# Altium PCB Barracuda3D.PcbDoc (part 1 of 3)
Units mil, origin at the board's own origin, x right, y up, seen from the top; angles counter-clockwise.
Board outline 4143.89 x 2810.03 mil, 5 copper layers (Top Layer, Mid-Layer 1, Groun Plane, Power Plane, Bottom Layer), stack 75.73 mil thick; 242 components, 180 nets, 863 pads, 455 vias.
Unrouted connection lines stored in the file: 270.
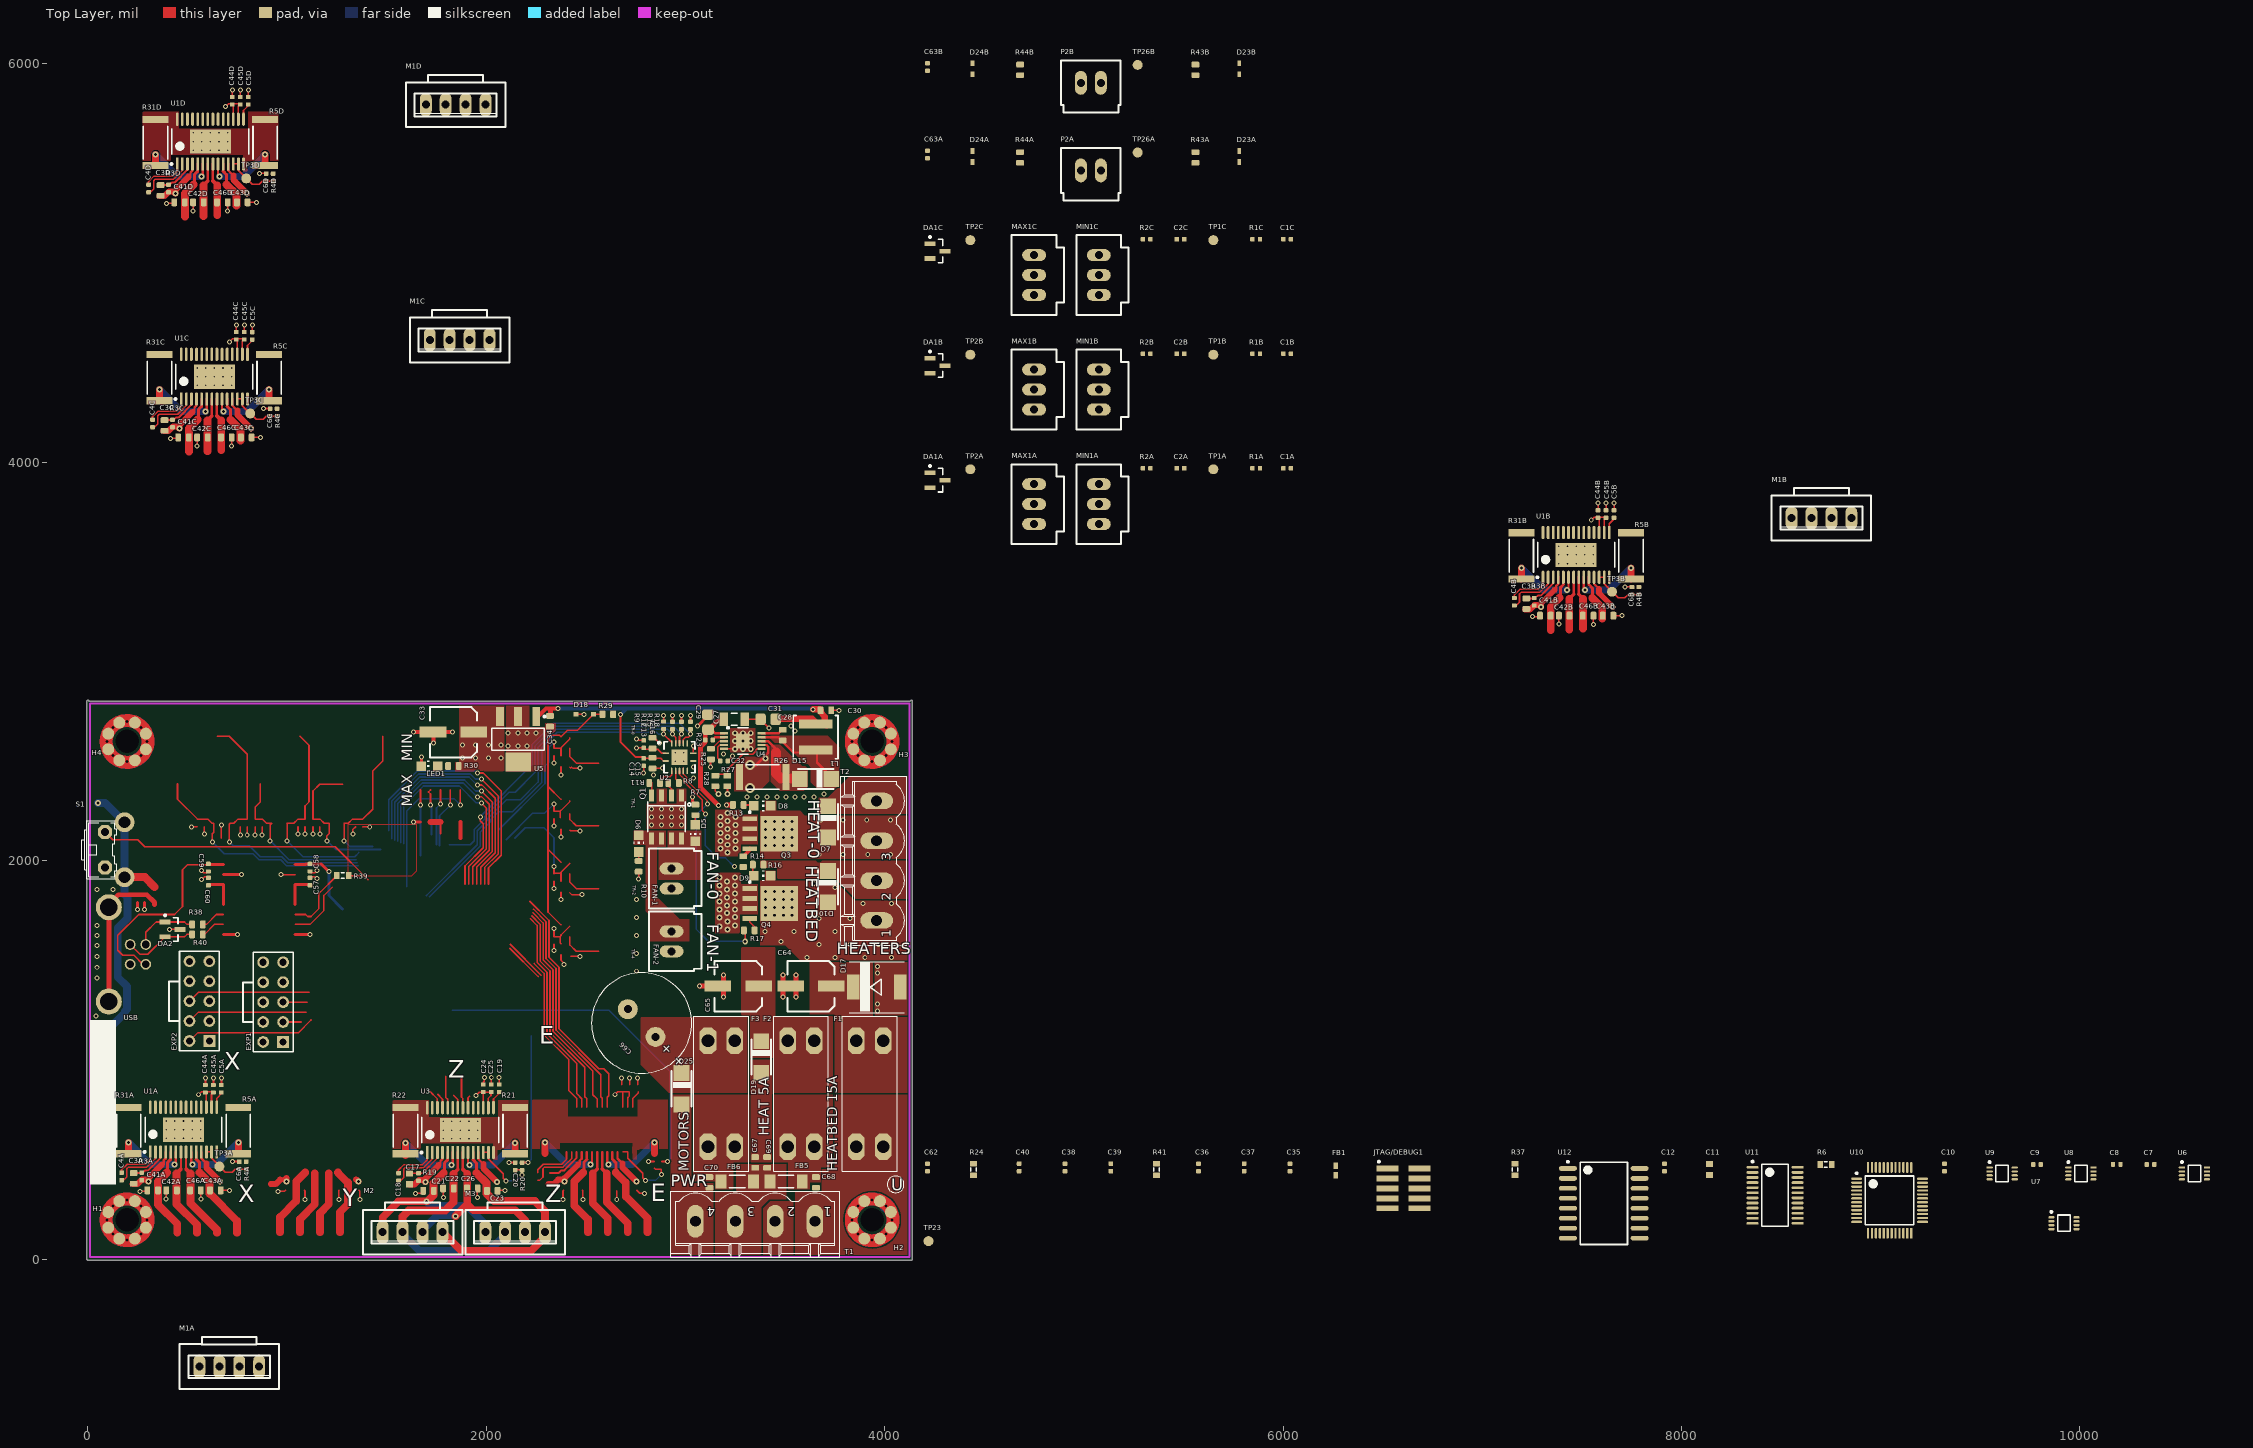
[diagram p0: Top Layer view]
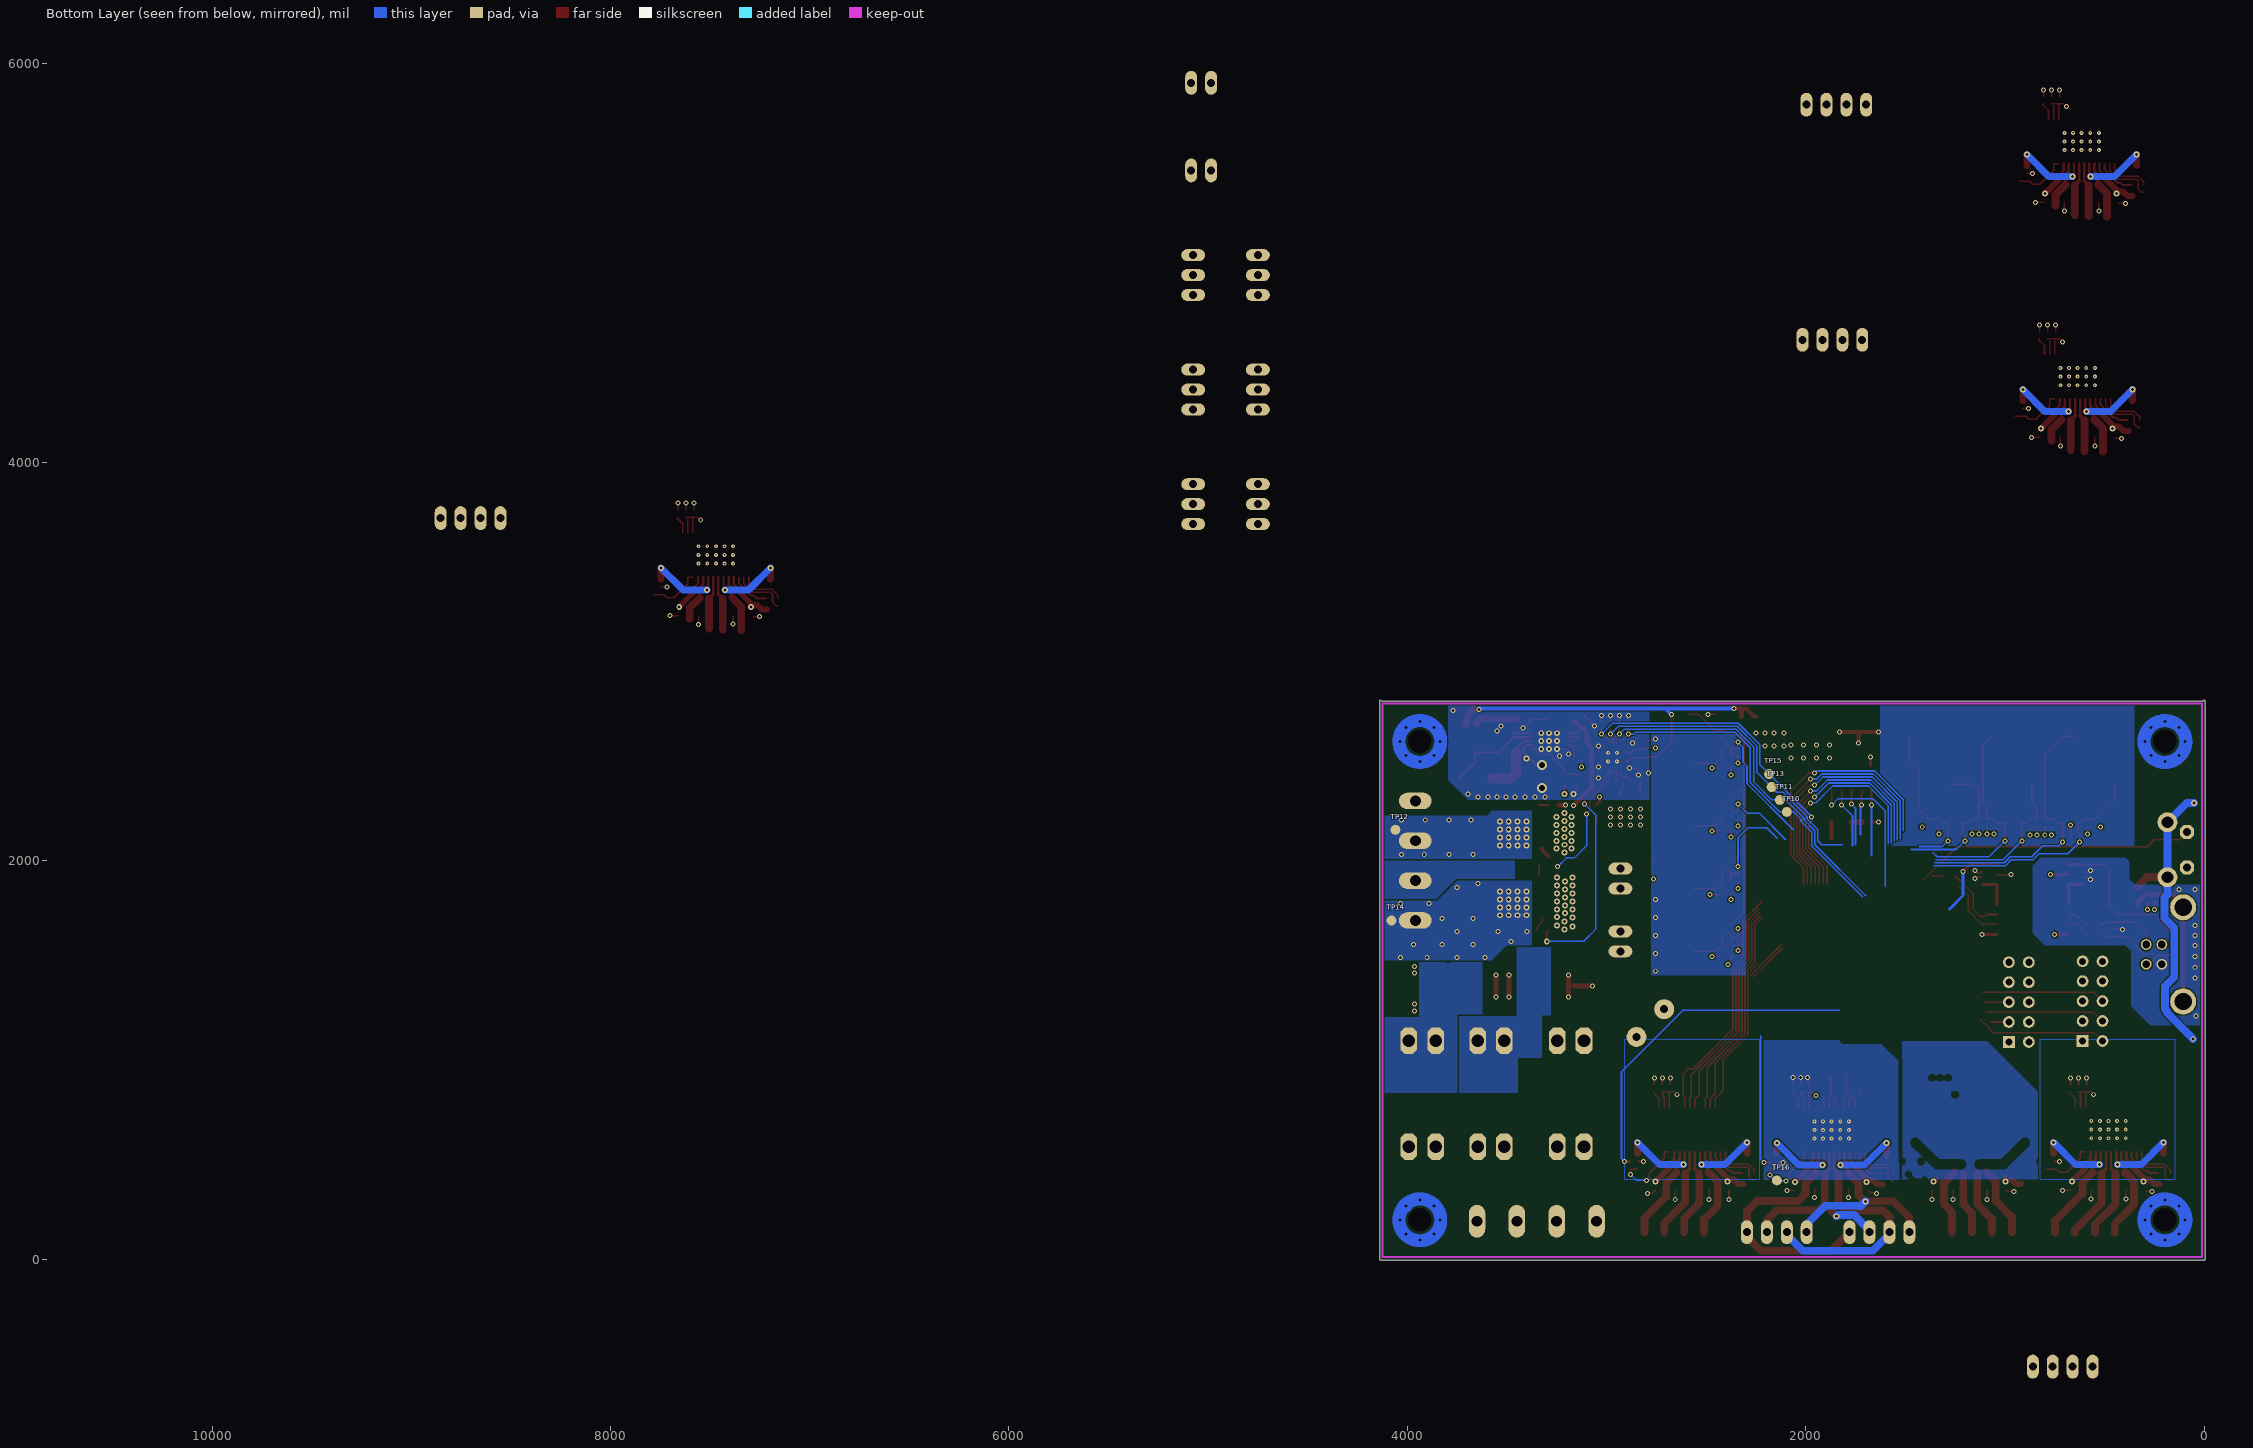
[diagram p1: Bottom Layer view, seen from below]
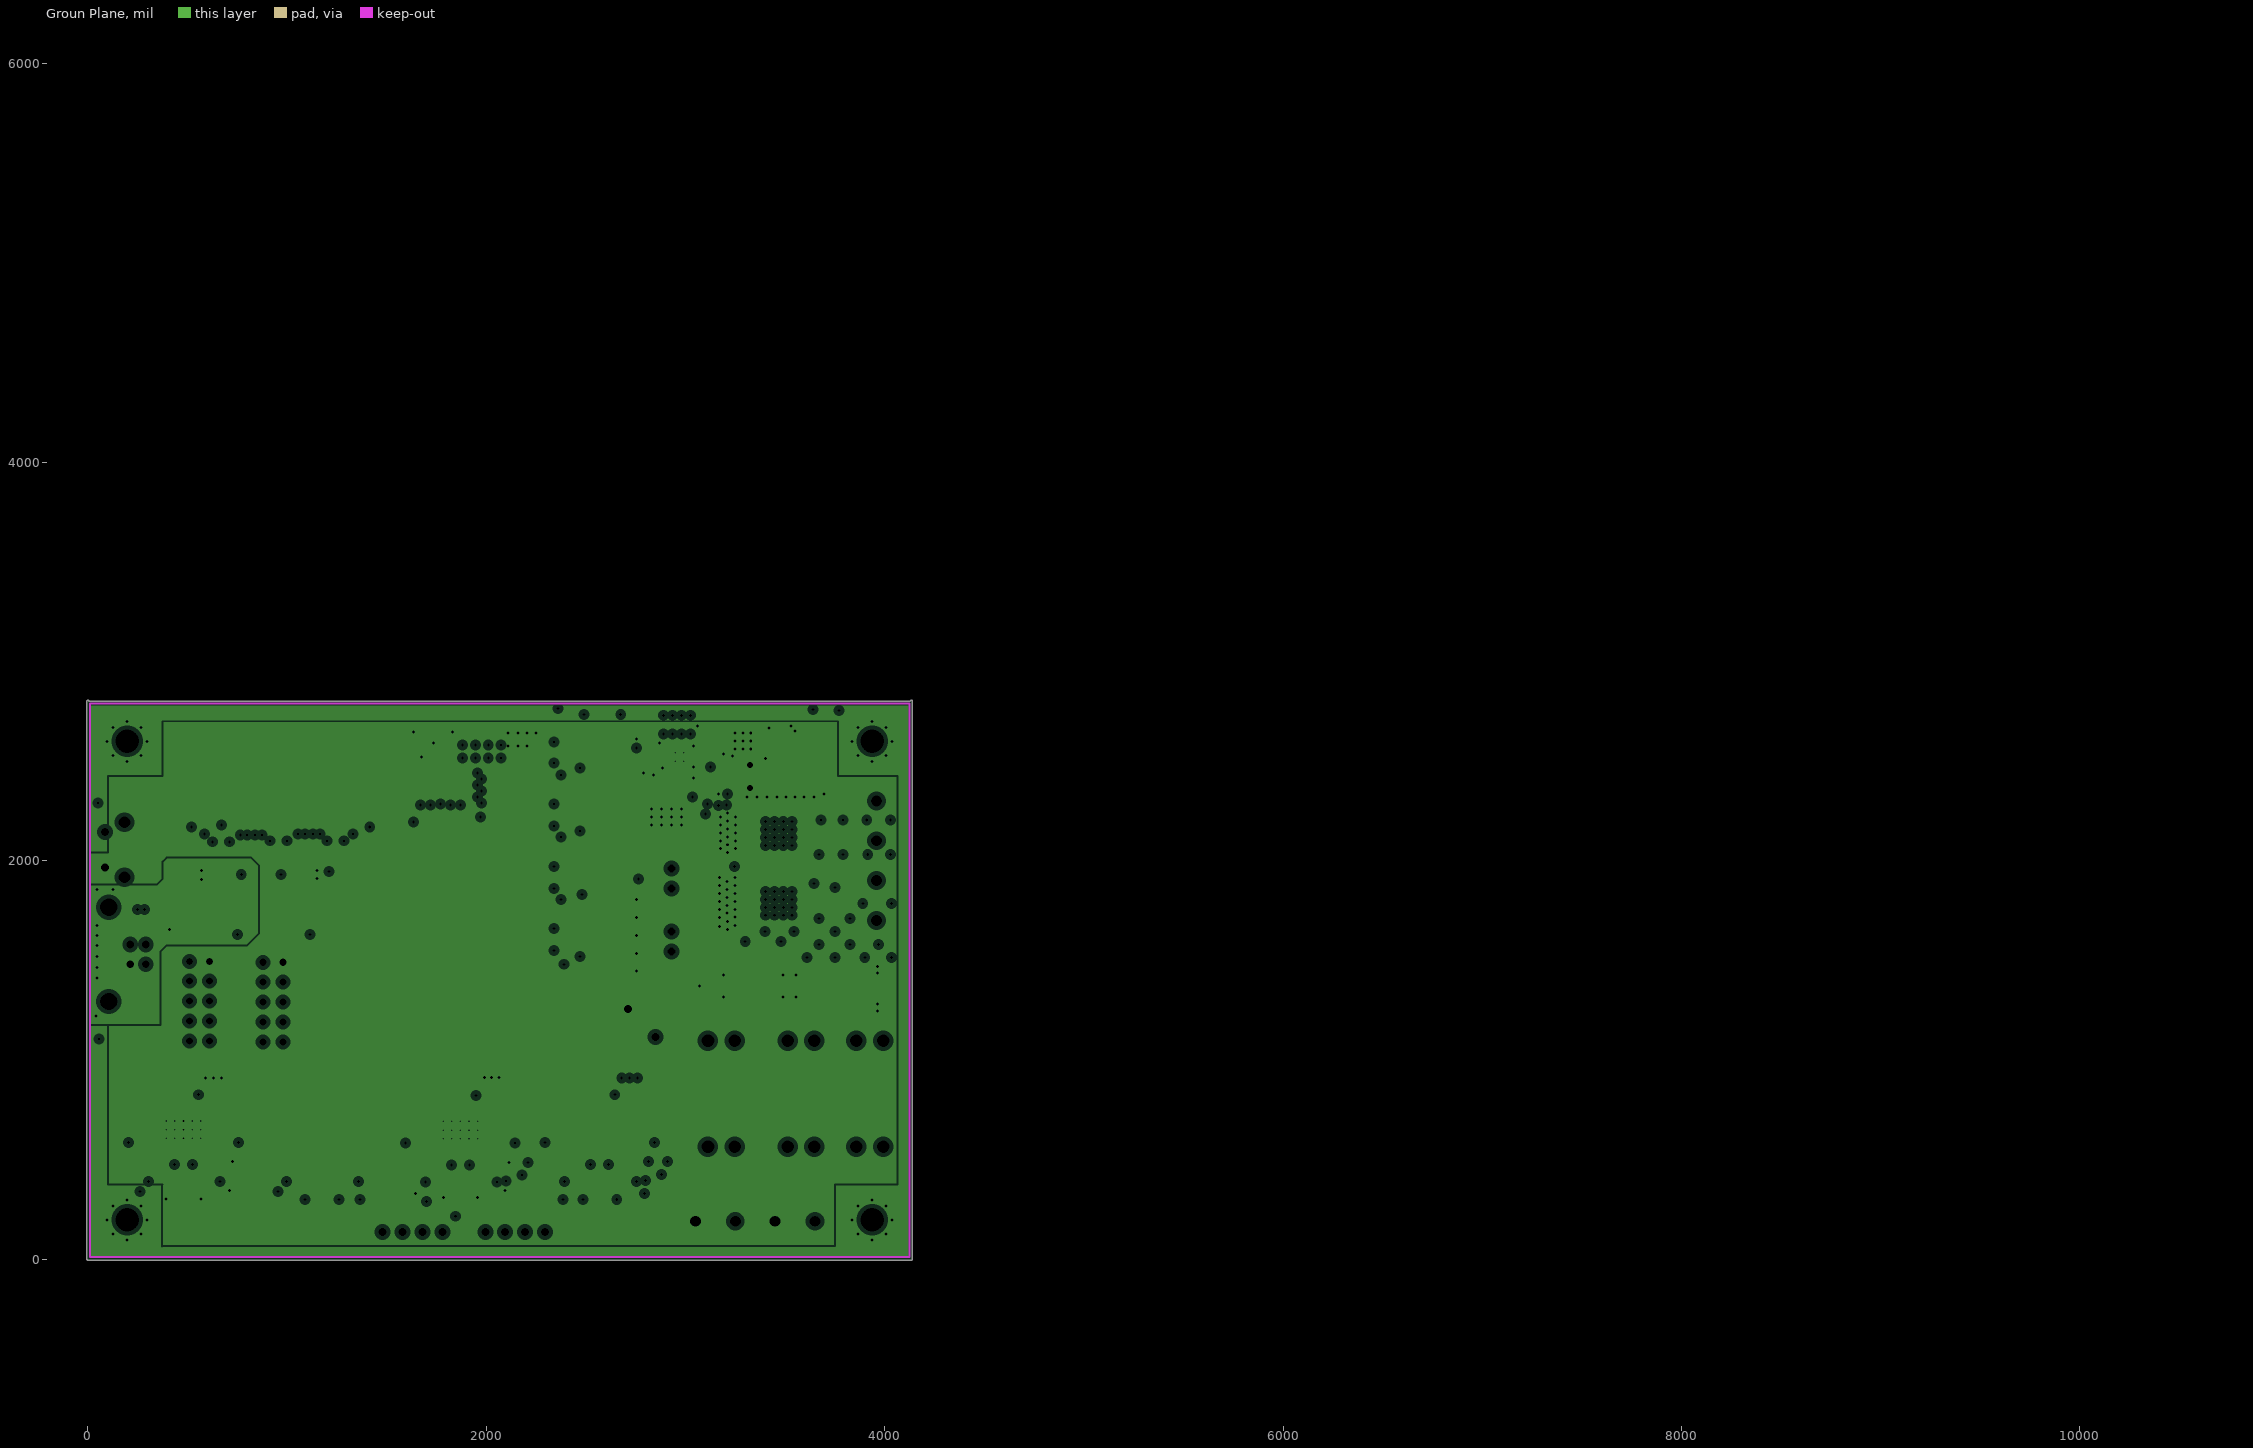
[diagram p2: Groun Plane, clearances drawn from the general rule]
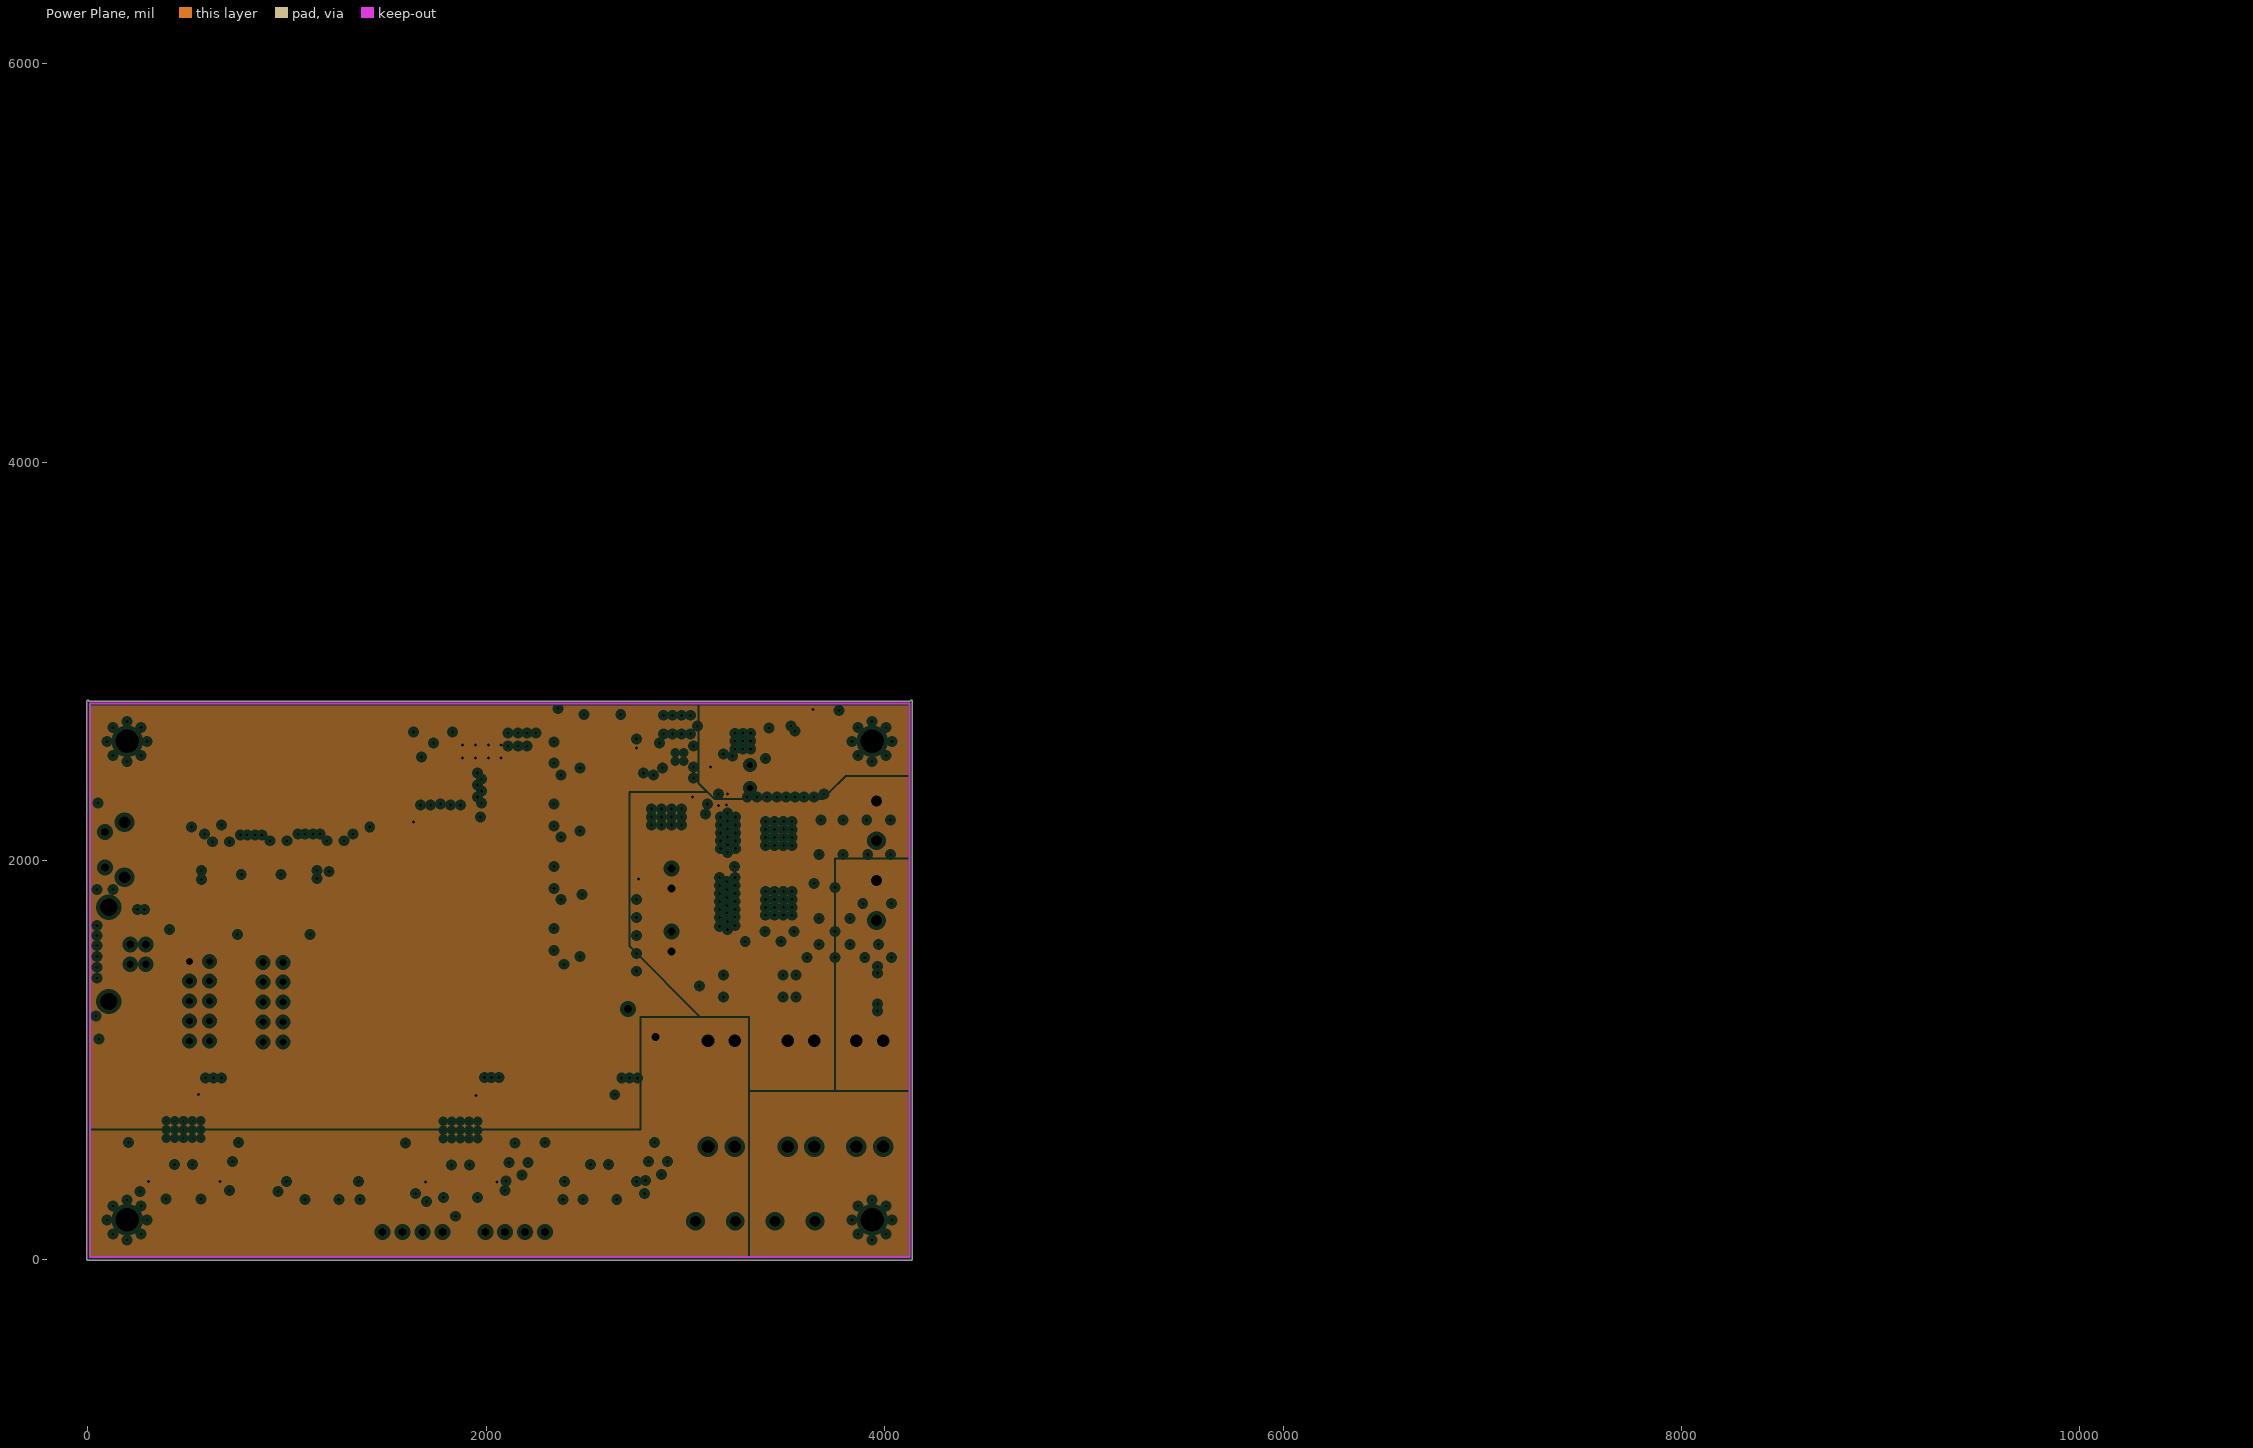
[diagram p3: Power Plane, clearances drawn from the general rule]

## Layer stack, top to bottom
Top Solder: solder mask 0.4, Solder Resist, Dk 3.5
Top Layer: signal copper 2.75
Dielectric1: prepreg 21.654, FR-4, Dk 4.2
Mid-Layer 1: signal copper 1.4
Dielectric4: dielectric 12.6, FR-4, Dk 4.8
Groun Plane: plane copper 1.4, net (Multiple Nets)
Dielectric2: core 10.236, FR-4, Dk 4.2
Power Plane: plane copper 1.4, net (Multiple Nets)
Dielectric3: prepreg 21.54, FR-4, Dk 4.2
Bottom Layer: signal copper 2.75
Bottom Solder: solder mask 0.4, Solder Resist, Dk 3.5

## Board outline
0,-5.01 cw(c0,0) -5.01,0 -5.01,2800 cw(c0,2800) 5.01,2800.29 4128.85,2800.29 cw(c4133.86,2800) 4138.87,2800 4138.87,0 cw(c4133.86,0) 4133.86,-5.01

## Design rules (kind name [scope] priority, off if disabled: settings)
Clearance [All] p1: gap=7
ComponentClearance [All] p1: gap=0 collisioncheckmode=3 verticalgap=10 showdistances=FALSE
DiffPairsRouting [All] p1: maxlimit=10 minlimit=10 mostfreqgap=10 toplayer_minwidth=15 toplayer_maxwidth=15 toplayer_prefwidth=15 midlayer1_minwidth=15 midlayer1_maxwidth=15 midlayer1_prefwidth=15 bottomlayer_minwidth=15 bottomlayer_maxwidth=15 bottomlayer_prefwidth=15 maxuncoupledlength=500
FanoutControl Fanout_SOIC [(InComponent('U8') AND InComponent('U7'))] p3: bgadir=Out bgaviamode=Centered fanoutstyle=Staggered fanoutdirection=Alternating viagrid=1 // Fanout_SOIC (Default Rule)
FanoutControl Fanout_Small [All] p4: bgadir=Out bgaviamode=Centered fanoutstyle=Auto fanoutdirection=Alternating viagrid=1 // Fanout_Small (Default Rule)
HoleSize [All] p1: absolutevalues=TRUE maxlimit=200 minlimit=15 maxpercent=80.000 minpercent=20.000
MinimumSolderMaskSliver [All] p1 off: minsoldermaskwidth=10
PlaneClearance [All] p1: clearance=20
PlaneConnect [All] p1: planeconnectstyle=Direct reliefexpansion=20 reliefentries=4 reliefconductorwidth=10 reliefairgap=10
PolygonConnect [All] p1: connectstyle=Direct reliefconductorwidth=45 reliefentries=4 polygonreliefangle="90 Angle" airgapwidth=10
RoomDefinition U_Dogfish3D-ThermistorChannelB [InComponentClass('U_Dogfish3D-ThermistorChannelB')] p1: confinementstyle=ConfineIn formatcopy=TRUE lockcomponents=FALSE outline 4185,5745 5950,5745 5950,6130 4185,6130
RoomDefinition U_Dogfish3D-ThermistorChannelA [InComponentClass('U_Dogfish3D-ThermistorChannelA')] p2: confinementstyle=ConfineIn formatcopy=TRUE lockcomponents=FALSE outline 4185,5305 5950,5305 5950,5690 4185,5690
RoomDefinition "U_Dogfish3D - MCU - ATSAMD21G18" [InComponentClass('U_Dogfish3D - MCU - ATSAMD21G18')] p3: confinementstyle=ConfineIn formatcopy=TRUE lockcomponents=FALSE outline 4185,55 10670,55 10670,605 4185,605
RoomDefinition U_Dogfish3D-EndstopChannelC [InComponentClass('U_Dogfish3D-EndstopChannelC')] p4: confinementstyle=ConfineIn formatcopy=TRUE lockcomponents=FALSE outline 4180,4730 6090,4730 6090,5250 4180,5250
RoomDefinition U_Dogfish3D-EndstopChannelB [InComponentClass('U_Dogfish3D-EndstopChannelB')] p5: confinementstyle=ConfineIn formatcopy=TRUE lockcomponents=FALSE outline 4180,4155 6090,4155 6090,4675 4180,4675
RoomDefinition U_Dogfish3D-EndstopChannelA [InComponentClass('U_Dogfish3D-EndstopChannelA')] p6: confinementstyle=ConfineIn formatcopy=TRUE lockcomponents=FALSE outline 4180,3580 6090,3580 6090,4100 4180,4100
RoomDefinition Dogfish3D-DriverChannelD [InComponentClass('Dogfish3D-DriverChannelD')] p7: confinementstyle=ConfineIn formatcopy=TRUE lockcomponents=FALSE outline 965,4985 965,5970 265,5970 265,4985
RoomDefinition Dogfish3D-DriverChannelC [InComponentClass('Dogfish3D-DriverChannelC')] p8: confinementstyle=ConfineIn formatcopy=TRUE lockcomponents=FALSE outline 985,3805 985,4790 285,4790 285,3805
RoomDefinition Dogfish3D-DriverChannelB [InComponentClass('Dogfish3D-DriverChannelB')] p9: confinementstyle=ConfineIn formatcopy=TRUE lockcomponents=FALSE outline 7821.3,2910 7821.3,3895 7121.3,3895 7121.3,2910
RoomDefinition Dogfish3D-DriverChannelA [InComponentClass('Dogfish3D-DriverChannelA')] p10: confinementstyle=ConfineIn formatcopy=TRUE lockcomponents=FALSE outline 830,25 830,1010 130,1010 130,25
RoutingLayers [All] p1: top layer_v5=TRUE mid layer 1_v5=FALSE bottom layer_v5=TRUE
RoutingVias [All] p1: holewidth=15 width=25 viastyle="Through Hole" minholewidth=15 minwidth=25 maxholewidth=28 maxwidth=50
SilkToSilkClearance [All] p1 off: silktosilkclearance=10
SilkToSolderMaskClearance SilkscreenOverComponentPads [IsPad] p1 off: minsilkscreentomaskgap=10 clearancetoexposedcopper=TRUE
SolderMaskExpansion [All] p1: expansion=4
UnpouredPolygon [All] p1: allowunpoured=FALSE
Width [All] p1: maxlimit=200 minlimit=7 preferedwidth=8 midlayer1_maxwidth=50 minimp=50.000000 maximp=50.000000 favimp=50.000000
18 further rules are at their usual default settings.

## Classes and differential pairs
component class U_Dogfish3D-ThermistorChannelB: C63B D23B D24B P2B R43B R44B TP26B
component class U_Dogfish3D-ThermistorChannelA: C63A D23A D24A P2A R43A R44A TP26A
component class U_Dogfish3D-EndstopChannelC: C1C C2C DA1C MAX1C MIN1C R1C R2C TP1C TP2C
component class U_Dogfish3D-EndstopChannelB: C1B C2B DA1B MAX1B MIN1B R1B R2B TP1B TP2B
component class U_Dogfish3D-EndstopChannelA: C1A C2A DA1A MAX1A MIN1A R1A R2A TP1A TP2A
component class Dogfish3D-DriverChannelD: C3D C4D C5D C6D C41D C42D C43D C44D C45D C46D M1D R3D R4D R5D R31D TP3D U1D
component class Dogfish3D-DriverChannelC: C3C C4C C5C C6C C41C C42C C43C C44C C45C C46C M1C R3C R4C R5C R31C TP3C U1C
component class Dogfish3D-DriverChannelB: C3B C4B C5B C6B C41B C42B C43B C44B C45B C46B M1B R3B R4B R5B R31B TP3B U1B
component class Dogfish3D-DriverChannelA: C3A C4A C5A C6A C41A C42A C43A C44A C45A C46A M1A R3A R4A R5A R31A TP3A U1A
channel class TR: U_TR1 U_TR2 U_TR3 U_TR4
net class AN_BUS[1..4]: AN_BUS1 AN_BUS2 AN_BUS3 AN_BUS4
channel class M: M1 M2 M3
channel class ES: ES1 ES2 ES3
net class STEP_BUS[1..3]: STEP_BUS1 STEP_BUS2 STEP_BUS3
net class REF_BUS[1..3]: REF_BUS1 REF_BUS2 REF_BUS3
net class MOD2E_BUS[1..3]: MOD2E_BUS1 MOD2E_BUS2 MOD2E_BUS3
net class MOD1E_BUS[1..3]: MOD1E_BUS1 MOD1E_BUS2 MOD1E_BUS3
net class MOD0E_BUS[1..3]: MOD0E_BUS1 MOD0E_BUS2 MOD0E_BUS3
net class MAX_ES_BUS[1..3]: MAX_ES_BUS1 MAX_ES_BUS2 MAX_ES_BUS3
net class DIR_BUS[1..3]: DIR_BUS1 DIR_BUS2 DIR_BUS3
component class "U_Dogfish3D - Power": C27 C28 C29 C30 C31 C32 C33 C34 C64 C65 C66 C67 C68 C69 C70 D15 D17 D18 D19 D25 F1 F2 F3 FB5 FB6 H1 H2 H3 H4 L1 LED1 R23 R25 R26 R27 R28 R29 R30 T1 TP23 U4 U5
component class U_MZ: C17 C18 C19 C20 C21 C22 C23 C24 C25 C26 M2 M3 R19 R20 R21 R22 TP16 U3
component class "U_Dogfish3D - MOSFETs and Driver": C13 C14 C15 C16 D5 D6 D7 D8 D9 D10 FAN-1 FAN-2 Q1 Q3 Q4 R7 R8 R9 R10 R11 R12 R13 R14 R15 R16 R17 R18 T2 TP10 TP11 TP12 TP13 TP14 TP15 U2
component class "U_Dogfish3D - MCU - ATSAMD21G18": C7 C8 C9 C10 C11 C12 C35 C36 C37 C38 C39 C40 C57 C58 C59 C60 C62 DA2 EXP1 EXP2 FB1 JTAG/DEBUG1 R6 R24 R37 R38 R39 R40 R41 S1 U6 U7 U8 U9 U10 U11 U12 USB
differential pair UMCU: +UMCU_P -UMCU_N
differential pair UI: +UI_P -UI_N
differential pair UD: +UD_P -UD_N
differential pair R: +R_P -R_N

## Components (designator, comment, footprint, x,y, rotation, side; value= is the part's Value field where it differs from the comment)
C1A "0402" C0402 6020,3970 r0 top (schematic designator C1)
C1B "0402" C0402 6020,4545 r0 top (schematic designator C1)
C1C "0402" C0402 6020,5120 r0 top (schematic designator C1)
C2A "0402" C0402 5485,3970 r0 top (schematic designator C2)
C2B "0402" C0402 5485,4545 r0 top (schematic designator C2)
C2C "0402" C0402 5485,5120 r0 top (schematic designator C2)
C3A "100nF" C0603 230,405 r270 top (schematic designator C3)
C3B "100nF" C0603 7221.3,3290 r270 top (schematic designator C3)
C3C "100nF" C0603 385,4185 r270 top (schematic designator C3)
C3D "100nF" C0603 365,5365 r270 top (schematic designator C3)
C4A "0402" C0402 170,415 r270 top (schematic designator C4)
C4B "0402" C0402 7161.3,3300 r270 top (schematic designator C4)
C4C "0402" C0402 325,4195 r270 top (schematic designator C4)
C4D "0402" C0402 305,5375 r270 top (schematic designator C4)
C5A "0402" C0402 670,855 r270 top (schematic designator C5)
C5B "0402" C0402 7661.3,3740 r270 top (schematic designator C5)
C5C "0402" C0402 825,4635 r270 top (schematic designator C5)
C5D "0402" C0402 805,5815 r270 top (schematic designator C5)
C6A "100nF" C0402 760,470 r270 top (schematic designator C6)
C6B "100nF" C0402 7751.3,3355 r270 top (schematic designator C6)
C6C "100nF" C0402 915,4250 r270 top (schematic designator C6)
C6D "100nF" C0402 895,5430 r270 top (schematic designator C6)
C7 "100nF" C0402 10355,475 r0 top
C8 "100nF" C0402 10185,475 r0 top
C9 "100nF" C0402 9785,475 r0 top
C10 "100nF" C0402 9320,460 r90 top
C11 "0603" 1608[0603] 8140,450 r90 top
C12 "100nF" C0402 7915,460 r90 top
C13 "0402" C0402 2790,2585 r270 top
C14 "0402" C0402 2790,2495 r90 top
C15 "0603" C0603 2835,2490 r90 top
C16 "0603" C0603 2835,2590 r270 top
C17 "0603" 1608[0603] 1615,402.64 r90 top
C18 "0402" C0402 1560,412.64 r270 top
C19 "0402" C0402 2065,857.64 r270 top
C20 "100nF" C0402 2145,465 r90 top
C21 "10uF" C0603 1710,342.64 r180 top
C22 "10uF" C0603 1810,355 r180 top
C23 "10uF" C0603 2030,342.64 r0 top
C24 "100nF" C0402 1985,857.64 r90 top
C25 "100nF" C0402 2025,857.64 r90 top
C26 "10uF" C0603 1930,355 r0 top
C27 "4.7uF" C1206 3245,2710 r0 top
C28 "100nF" C0603 3488.31,2630.43 r270 top
C29 "1uF" C0805 3113.31,2695.43 r90 top
C30 "100nF" C0603 3705,2755 r0 top
C31 "10uF" C0805 3415,2710 r180 top
C32 "1uF" C0402 3193.31,2500.43 r0 top
C33 "EEE-1VA101XP" EEE-1VA101XP 1835,2645 r0 top
C34 "0603" C0603 2320,2700 r90 top
C35 "100nF" C0402 6035,460 r90 top
C36 "100nF" C0402 5575,460 r90 top
C37 "100nF" C0402 5805,460 r90 top
C38 "100nF" C0402 4905,460 r90 top
C39 "100nF" C0402 5135,460 r90 top
C40 "100nF" C0402 4675,460 r90 top
C41A "10uF" C0603 325,345 r180 top (schematic designator C41)
C41B "10uF" C0603 7316.3,3230 r180 top (schematic designator C41)
C41C "10uF" C0603 480,4125 r180 top (schematic designator C41)
C41D "10uF" C0603 460,5305 r180 top (schematic designator C41)
C42A "10uF" C0603 420,345 r180 top (schematic designator C42)
C42B "10uF" C0603 7411.3,3230 r180 top (schematic designator C42)
C42C "10uF" C0603 575,4125 r180 top (schematic designator C42)
C42D "10uF" C0603 555,5305 r180 top (schematic designator C42)
C43A "10uF" C0603 640,345 r0 top (schematic designator C43)
C43B "10uF" C0603 7631.3,3230 r0 top (schematic designator C43)
C43C "10uF" C0603 795,4125 r0 top (schematic designator C43)
C43D "10uF" C0603 775,5305 r0 top (schematic designator C43)
C44A "100nF" C0402 590,855 r90 top (schematic designator C44)
C44B "100nF" C0402 7581.3,3740 r90 top (schematic designator C44)
C44C "100nF" C0402 745,4635 r90 top (schematic designator C44)
C44D "100nF" C0402 725,5815 r90 top (schematic designator C44)
C45A "100nF" C0402 630,855 r90 top (schematic designator C45)
C45B "100nF" C0402 7621.3,3740 r90 top (schematic designator C45)
C45C "100nF" C0402 785,4635 r90 top (schematic designator C45)
C45D "100nF" C0402 765,5815 r90 top (schematic designator C45)
C46A "10uF" C0603 540,345 r0 top (schematic designator C46)
C46B "10uF" C0603 7531.3,3230 r0 top (schematic designator C46)
C46C "10uF" C0603 695,4125 r0 top (schematic designator C46)
C46D "10uF" C0603 675,5305 r0 top (schematic designator C46)
C57 "100nF" C0402 1115,1895 r90 top
C58 "100nF" C0402 1115,1965 r270 top
C59 "100nF" C0402 605,1965 r270 top
C60 "100nF" C0402 605,1895 r90 top
C62 "100nF" C0402 4215,460 r90 top
C63A "100nF" C0402 4215,5545 r90 top (schematic designator C63)
C63B "100nF" C0402 4215,5985 r90 top (schematic designator C63)
C64 "EEE-1VA101XP" EEE-1VA101XP 3630,1370 r0 top
C65 "EEE-1VA101XP" EEE-1VA101XP 3265,1370 r0 top
C66 "470uF" C12,5-5 2780,1185 r135 top
C67 "NP" C0603 3350,485 r90 top
C68 "NP" C0603 3655,385 r270 top
C69 "NP" C0603 3410,485 r90 top
C70 "NP" C0603 3120,385 r270 top
D5 "5988140107F" LED2012120 3050,2140 r270 top
D6 "5988140107F" LED2012120 2765,2085 r90 top
D7 "SK310A-TP" SMA-SM 3715,2195 r270 top
D8 "5988140107F" LED2012120 3385,2275 r0 top
D9 "5988140107F" LED2012120 3385,1925 r0 top
D10 "SK310A-TP" SMA-SM 3715,1870 r270 top
D15 "SK310A-TP" SMA-SM 3653.31,2410.43 r180 top
D17 "S3A-13-F" DO-214AB 3960,1365 r0 top
D18 "SZMM3Z4V7T1G" SOD323-R 2495,2735 r180 top
D19 "SK310A" SMA-SM 3380,1015 r270 top
D23A "1N4148WT" SOD523 5780,5535 r90 top (schematic designator D23)
D23B "1N4148WT" SOD523 5780,5975 r90 top (schematic designator D23)
D24A "1N4148WT" SOD523 4440,5535 r90 top (schematic designator D24)
D24B "1N4148WT" SOD523 4440,5975 r90 top (schematic designator D24)
D25 "SK310A" SMA-SM 2980,855 r270 top
DA1A "PESDxL2BT" SOT95P230X110-3N 4265,3910 r0 top (schematic designator DA1)
DA1B "PESDxL2BT" SOT95P230X110-3N 4265,4485 r0 top (schematic designator DA1)
DA1C "PESDxL2BT" SOT95P230X110-3N 4265,5060 r0 top (schematic designator DA1)
DA2 "PESDxL2BT" SOT95P230X110-3N 425,1655 r0 top
EXP1 "Header 5X2" HDR2X5 980,1090 r90 top
EXP2 "Header 5X2" HDR2X5 610,1095 r90 top
F1 "3557-2" 3557 3925,830 r90 top
F2 "3557-2" 3557 3580,830 r90 top
F3 "3557-2" 3557 3180,830 r90 top
FAN-1 "Molex 70543-02" 70543-02 2930,1910 r90 top
FAN-2 "Molex 70543-02" 70543-02 2930,1595 r90 top
FB1 "BLM15HG601SN1D" BLM18PG121SN1D 6265,445 r90 top
FB5 "BLM41PG600SN1L" L1806 3505,390 r0 top
FB6 "BLM41PG600SN1L" L1806 3260,390 r180 top
H1 "Hole" Wave_hole_3x7-singleSided#1 196.85,196.85 r0 top
H2 "Hole" Wave_hole_3x7-singleSided#1 3937.01,196.85 r0 top
H3 "Hole" Wave_hole_3x7-singleSided#1 3937.01,2598.43 r0 top
H4 "Hole" Wave_hole_3x7-singleSided#2 196.85,2598.43 r0 top
JTAG/DEBUG1 "FTSH-105-XX-X-DV" FTSH-105-XX-X-DV 6605,355 r90 top
L1 "XAL5050-153MEB" XAL50xx-153 3653.31,2620.43 r90 top
LED1 "5988170107F" LED2012120 1715,2475 r180 top
M1A "Molex 0705430003" 4POL254 710,-540 r180 top (schematic designator M1)
M1B "Molex 0705430003" 4POL254 8702.6,3720 r180 top (schematic designator M1)
M1C "Molex 0705430003" 4POL254 1866.3,4615 r180 top (schematic designator M1)
M1D "Molex 0705430003" 4POL254 1846.3,5795 r180 top (schematic designator M1)
M2 "Molex 0705430003" 4POL254 1630,135 r180 top
M3 "Molex 0705430003" 4POL254 2145,135 r180 top
MAX1A "Molex 70543-03" 70543-03 4750,3790 r90 top (schematic designator MAX1)
MAX1B "Molex 70543-03" 70543-03 4750,4365 r90 top (schematic designator MAX1)
MAX1C "Molex 70543-03" 70543-03 4750,4940 r90 top (schematic designator MAX1)
MIN1A "Molex 70543-03" 70543-03 5075,3790 r90 top (schematic designator MIN1)
MIN1B "Molex 70543-03" 70543-03 5075,4365 r90 top (schematic designator MIN1)
MIN1C "Molex 70543-03" 70543-03 5075,4940 r90 top (schematic designator MIN1)
P2A "Molex 70543-02" 70543-02 5035,5465 r0 top (schematic designator P2)
P2B "Molex 70543-02" 70543-02 5035,5905 r0 top (schematic designator P2)
Q1 "NCV8402AD" NCV8402AD-SOIC8 2905,2220 r180 top (schematic designator Q8)
Q3 "PSMN7R0-60YS" PSMN7R0-60YS 3425,2135 r0 top
Q4 "PSMN7R0-60YS" PSMN7R0-60YS 3425,1785 r0 top
R1A "2.7K" R0402 5865,3970 r0 top (schematic designator R1)
R1B "2.7K" R0402 5865,4545 r0 top (schematic designator R1)
R1C "2.7K" R0402 5865,5120 r0 top (schematic designator R1)
R2A "2.7K" R0402 5315,3970 r0 top (schematic designator R2)
R2B "2.7K" R0402 5315,4545 r0 top (schematic designator R2)
R2C "2.7K" R0402 5315,5120 r0 top (schematic designator R2)
R3A "1M" R0402 270,415 r270 top (schematic designator R3)
R3B "1M" R0402 7261.3,3300 r270 top (schematic designator R3)
R3C "1M" R0402 425,4195 r270 top (schematic designator R3)
R3D "1M" R0402 405,5375 r270 top (schematic designator R3)
R4A "2.7K" R0402 795,470 r270 top (schematic designator R4)
R4B "2.7K" R0402 7786.3,3355 r270 top (schematic designator R4)
R4C "2.7K" R0402 950,4250 r270 top (schematic designator R4)
R4D "2.7K" R0402 930,5430 r270 top (schematic designator R4)
R5A "2512" 2512R-0.55 755,645 r270 top (schematic designator R5)
R5B "2512" 2512R-0.55 7746.3,3530 r270 top (schematic designator R5)
R5C "2512" 2512R-0.55 910,4425 r270 top (schematic designator R5)
R5D "2512" 2512R-0.55 890,5605 r270 top (schematic designator R5)
R6 "Res3" J1-0603 8725,475 r0 top
R7 "1.8K" R0603 3050,2255 r90 top
R8 "10r" R0603 2940,2390 r180 top
R9 "100K" R0402 2890,2680 r270 top
R10 "1.8K" R0603 2765,1971.77 r270 top
R11 "10r" R0603 2845,2390 r180 top
R12 "100K" R0402 2935,2679 r270 top
R13 "1.8K" R0603 3265,2280 r180 top
R14 "10r" R0603 3290,1995 r90 top
R15 "100K" R0402 2980,2679 r270 top
R16 "1.8K" R0603 3365,1980 r0 top
R17 "10r" R0603 3320,1650 r0 top
R18 "100K" R0402 3025,2679 r270 top
R19 "1M" R0402 1660,412.64 r270 top
R20 "2.7K" R0402 2180,465 r270 top
R21 "2512" 2512R-0.55 2145,645 r270 top
R22 "2512" 2512R-0.55 1595,645 r270 top
R23 "200K" R0402 3118.31,2605.43 r180 top
R24 "Res3" J1-0603 4445,450 r90 top
R25 "10K" R0603 3128.31,2535.43 r270 top
R26 "0.6r" 2512R-0.55 3388.31,2420.43 r0 top
R27 "10K" R0603 3210,2400 r90 top
R28 "10K" R0603 3150,2400 r270 top
R29 "10K" R0603 2610,2735 r0 top
R30 "1K" R0603 1835,2475 r0 top
R31A "2512" 2512R-0.55 205,645 r270 top (schematic designator R31)
R31B "2512" 2512R-0.55 7196.3,3530 r270 top (schematic designator R31)
R31C "2512" 2512R-0.55 360,4425 r270 top (schematic designator R31)
R31D "2512" 2512R-0.55 340,5605 r270 top (schematic designator R31)
R37 "0603" J1-0603 7165,450 r90 top
R38 "24r" R0603 550,1680 r180 top
R39 "0603" J1-0603 1280,1925 r180 top
R40 "24r" R0603 550,1630 r180 top
R41 "Res3" J1-0603 5365,450 r90 top
R43A "4.7K" R0603 5560,5530 r90 top (schematic designator R43)
R43B "4.7K" R0603 5560,5970 r90 top (schematic designator R43)
R44A "4.7K" R0603 4680,5530 r90 top (schematic designator R44)
R44B "4.7K" R0603 4680,5970 r90 top (schematic designator R44)
S1 "1571610-2" B3F-31XX 135,2055 r270 top
T1 "con-phoenix-508 - 4" MSTBV4 3350,190 r180 top
T2 "con-phoenix-508 - 4" MSTBV4 3960,2000 r90 top
TP1A "TP4" TP-2 5650,3965 r90 top (schematic designator TP1)
TP1B "TP4" TP-2 5650,4540 r90 top (schematic designator TP1)
TP1C "TP4" TP-2 5650,5115 r90 top (schematic designator TP1)
TP2A "TP4" TP-2 4430,3965 r90 top (schematic designator TP2)
TP2B "TP4" TP-2 4430,4540 r90 top (schematic designator TP2)
TP2C "TP4" TP-2 4430,5115 r90 top (schematic designator TP2)
TP3A "TP4" TP-2 660,465 r180 top (schematic designator TP3)
TP3B "TP4" TP-2 7651.3,3350 r180 top (schematic designator TP3)
TP3C "TP4" TP-2 815,4245 r180 top (schematic designator TP3)
TP3D "TP4" TP-2 795,5425 r180 top (schematic designator TP3)
TP10 "TP4" TP-2 2095,2245 r90 bottom
TP11 "TP4" TP-2 2130,2305 r90 bottom
TP12 "TP4" TP-2 4060,2155 r90 bottom
TP13 "TP4" TP-2 2170.91,2370 r90 bottom
TP14 "TP4" TP-2 4080,1700 r90 bottom
TP15 "TP4" TP-2 2183.79,2435 r90 bottom
TP16 "TP4" TP-2 2145,395 r90 bottom
TP23 "TP4" TP-2 4220,90 r90 top
TP26A "TP4" TP-2 5270,5555 r90 top (schematic designator TP26)
TP26B "TP4" TP-2 5270,5995 r90 top (schematic designator TP26)
U1A "DRV8825" DRV8825PWPR 480,650 r90 top (schematic designator U1)
U1B "DRV8825" DRV8825PWPR 7471.3,3535 r90 top (schematic designator U1)
U1C "DRV8825" DRV8825PWPR 635,4430 r90 top (schematic designator U1)
U1D "DRV8825" DRV8825PWPR 615,5610 r90 top (schematic designator U1)
U2 "TXS0104E" "RGY  (S-PVQFN-N14)" 2970,2520 r0 top
U3 "DRV8825" DRV8825PWPR 1870,647.64 r90 top
U4 "LM25011MY/NOPB" VSSOP10 3288.31,2600.43 r0 top
U5 "MIC5209-3.3YS" SOT230P700X190-4N 2160,2610 r270 top
U6 "SN74LVC1G139" "Ti DCU (R-PDSO-G8) SOIC - SN74VC1G139" 10575,430 r0 top
U7 "SN74LVC1G139" "Ti DCU (R-PDSO-G8) SOIC - SN74VC1G139" 9920,180 r0 top
U8 "SN74LVC1G139" "Ti DCU (R-PDSO-G8) SOIC - SN74VC1G139" 10005,430 r0 top
U9 "SN74LVC1G139" "Ti DCU (R-PDSO-G8) SOIC - SN74VC1G139" 9610,430 r0 top
U10 "ATSAMD21G18" TSQFP50P900X900X120-48N 9045,295 r0 top
U11 "AD5206" "AD5206 & AD5204" 8470,320 r0 top
U12 "ADuM4160" ADuM4160 7610,280 r0 top
USB "USB-B" PN61729 105,1530 r270 top

## Footprints (in the part's own frame and the unit in brackets; to place one, negate y for a bottom-side part, rotate by r counter-clockwise, add the part's x,y. Pads: shape width x height; smd on the part's side, far side on the other; paste and mask are expansions set on the pad)
4POL254 [mil]
  oval 60x120 hole 40: 1(-150,0) 2(-50,0) 3(50,0) 4(150,0)
  silkscreen extent -250,-150 250,113, body extent -250,-150 250,113, height 454
1608[0603] [mm] "Chip Capacitor, Body 1.6x0.8mm, IPC High Density"
  rect 0.8x0.9 smd: 1(-0.7,0) 2(0.7,0)
  body extent -0.87,-0.48 0.87,0.48, height 1.3
2512R-0.55 [mm] "2512 Resistor 6.35mm x 3.2mm x 0.55mm"
  rect 0.9x3.3 smd: 1(-2.95,0) 2(2.95,0)
  silkscreen extent -2.1,-1.55 2.1,1.55, body extent -3.22,-1.68 3.22,1.68, height 0.65
3557 [mil] "3557"
  oct 133x83 hole 63: 1(-265,-67) 1(-265,67) 2(265,-67) 2(265,67)
  silkscreen extent -390,-138 390,138, body extent -392,-140 392,140, height 709
70543-02 [mil]
  oval 60x120 hole 40: 1(-50,0) 2(50,0)
  silkscreen extent -150,-150 150,113, body extent -150,-150 150,113, height 450
70543-03 [mil]
  oval 60x120 hole 40: 1(-100,0) 2(0,0) 3(100,0)
  silkscreen extent -200,-150 200,113, body extent -200,-150 200,113, height 450
"AD5206 & AD5204" [mm] "SOP, 24-Leads, Body 7.80x4.40mm, Pitch 0.65mm, IPC Medium Density"
  oval 1.55x0.35 smd: 1(-2.875,3.575) 2(-2.875,2.925) 3(-2.875,2.275) 4(-2.875,1.625) 5(-2.875,0.975) 6(-2.875,0.325) 7(-2.875,-0.325) 8(-2.875,-0.975) 9(-2.875,-1.625) 10(-2.875,-2.275) 11(-2.875,-2.925) 12(-2.875,-3.575) 13(2.875,-3.575) 14(2.875,-2.925) 15(2.875,-2.275) 16(2.875,-1.625) 17(2.875,-0.975) 18(2.875,-0.325) 19(2.875,0.325) 20(2.875,0.975) 21(2.875,1.625) 22(2.875,2.275) 23(2.875,2.925) 24(2.875,3.575)
  silkscreen extent -3,-3.95 1.7,4.42, body extent -2.25,-3.95 2.25,3.95, height 2.65
ADuM4160 [mm] "SOIC, 16-Leads, Body 10.30x7.50mm, Pitch 1.27mm, IPC Medium Density"
  oval 2.3x0.6 smd: 1(-4.575,4.445) 2(-4.575,3.175) 3(-4.575,1.905) 4(-4.575,0.635) 5(-4.575,-0.635) 6(-4.575,-1.905) 7(-4.575,-3.175) 8(-4.575,-4.445) 9(4.575,-4.445) 10(4.575,-3.175) 11(4.575,-1.905) 12(4.575,-0.635) 13(4.575,0.635) 14(4.575,1.905) 15(4.575,3.175) 16(4.575,4.445)
  silkscreen extent -4.7,-5.25 3.03,5.42, body extent -3.8,-5.25 3.8,5.25, height 2.65
B3F-31XX [mil]
  oct 70x70 hole 40: 1(-89,-49) 2(89,-49)
  round 100 hole 59: 3(-138,49) 4(138,49)
  silkscreen extent -145,-165 145,10, body extent -165,-200 165,109, height 303
BLM18PG121SN1D [mm] "Chip Inductor, 2-Leads, Body 1.0x0.5mm, IPC Medium Density"
  rect 0.8x0.6 smd: 1(-0.6,0) 2(0.6,0)
  body extent -0.52,-0.28 0.53,0.27, height 0.6
C12,5-5 [mil]
  round 100 hole 40: 1(-98.43,0) 2(98.43,0)
  silkscreen extent -252,-252 252,252, body extent -252,-252 252,252, height 787
C0402 [mil]
  rrect40% 22x24 smd: 1(-18.7,0) 2(19,0)
  body extent -20,-10 20,10, height 20
C0603 [mm]
  rrect40% 0.74x1 smd: 1(-0.68,0) 2(0.68,0)
  body extent -0.8,-0.4 0.8,0.4, height 0.8
C0805 [mil]
  rrect50% 52x60 smd: 1(-37.4,0) 2(38,0)
  body extent -40,-30 40,30, height 35
C1206 [mm]
  rect 1.1x1.7 smd: 1(-1.325,0) 2(1.325,0)
  silkscreen extent -0.4,-0.75 0.4,0.75, body extent -1.68,-0.87 1.67,0.88, height 1.6
DO-214AB [mil]
  rect 63x126 smd: A(119,0) C(-118.11,0)
  silkscreen extent -138,-128 138,128, body extent -140,-130 140,130, height 98
DRV8825PWPR [mm] "PowerPAD (HTSSOP) - PWP"
  oval 1.7x0.35 smd: 1(-2.85,4.225) 2(-2.85,3.575) 3(-2.85,2.925) 4(-2.85,2.275) 5(-2.85,1.625) 6(-2.85,0.975) 7(-2.85,0.325) 8(-2.85,-0.325) 9(-2.85,-0.975) 10(-2.85,-1.625) 11(-2.85,-2.275) 12(-2.85,-2.925) 13(-2.85,-3.575) 14(-2.85,-4.225) 15(2.85,-4.225) 16(2.85,-3.575) 17(2.85,-2.925) 18(2.85,-2.275) 19(2.85,-1.625) 20(2.85,-0.975) 21(2.85,-0.325) 22(2.85,0.325) 23(2.85,0.975) 24(2.85,1.625) 25(2.85,2.275) 26(2.85,2.925) 27(2.85,3.575) 28(2.85,4.225)
  rect 3.1x5.22 smd: 29(0,0)
  silkscreen extent -2.97,-4.9 1.6,5.07, body extent -2.25,-4.9 2.25,4.9, height 1.2
EEE-1VA101XP [mm] "Panasonic VS D EEE-1VA101XP"
  rect 3.4x1.4 smd: 1(2.6,0) 2(-2.6,0)
  silkscreen extent -3,-3.2 3,3.2, body extent -3.5,-3.3 3.5,3.3, height 5.4
FTSH-105-XX-X-DV [mm] "1.27mm pitch, 10 pin, terminal strip; vertical, SMT"
  rect 0.75x2.8 smd mask+0: 1(2.54,2.03) 2(2.54,-2.03) 3(1.27,2.03) 4(1.27,-2.03) 5(0,2.03) 6(0,-2.03) 7(-1.27,2.03) 8(-1.27,-2.03) 9(-2.54,2.03) 10(-2.54,-2.03)
  silkscreen extent 3.28,3.03 3.52,3.27
HDR2X5 [mm] "Connector; Header; 5x2 Position"
  rect 1.5x1.5 hole 0.9: 1(0,0)
  round 1.5 hole 0.9: 2(0,2.54) 3(2.54,0) 4(2.54,2.54) 5(5.08,0) 6(5.08,2.54) 7(7.62,0) 8(7.62,2.54) 9(10.16,0) 10(10.16,2.54)
  silkscreen extent -1.27,-1.27 11.43,3.81
J1-0603 [mm] "Chip Resistor, Body 1.6x0.8mm, IPC High Density"
  rect 0.7x0.9 smd: 1(-0.75,0) 2(0.75,0)
  silkscreen extent -0.2,-0.35 0.2,0.35, body extent -0.85,-0.48 0.85,0.48, height 0.9
L1806 [mm] "Chip Inductor, 2-Leads, Body 4.50x1.60mm, IPC Medium Density"
  rect 1.38x1.8 smd: 1(-2.06,0) 2(2.06,0)
  silkscreen extent -1,-0.8 1,0.8, body extent -2.35,-0.9 2.35,0.9, height 1.8
LED2012120 [mil]
  rect 48x48 smd: A(-41.34,0) C(42,0)
  silkscreen extent 0,-27 12,27, body extent -50,-25 50,25, height 28
MSTBV4 [mil]
  oval 82.5x165 hole 55: 1(-300,0) 2(-100,0) 3(100,0) 4(300,0)
  silkscreen extent -425,-150 425,180, body extent -428,-153 428,183, height 472
NCV8402AD-SOIC8 [mil]
  rect 24x60 smd: 1(-75,-108.27) 2(-25,-108.27) 3(25,-108.27) 4(75,-108.27) 5(25,109) 5(75,109) 7(-75,109) 7(-25,109)
  silkscreen extent -122,-75 95,75, body extent -98,-130 99,130, height 58
PN61729 [mil]
  round 54 hole 38: 1(50,186) 2(-49.21,186) 3(-49.21,107) 4(50,107)
  round 130.5 hole 87: P$1(-236.22,0) P$2(237,0)
  body extent -237,-405 238,226, height 406
PSMN7R0-60YS [mm]
  rect 1.8x0.6 smd: 1(-2.6,1.905) 2(-2.6,0.635) 3(-2.6,-0.635) 4(-2.6,-1.905)
  rect 4.8x4.5 smd: 5(1.14,0)
  silkscreen extent -2.72,2.63 -2.47,2.88, body extent -1.85,-2.5 2.25,2.5, height 1.2
R0402 [mil]
  rrect40% 22x24 smd: 1(-18.9,0) 2(19,0)
  body extent -20,-10 20,10, height 14
R0603 [mm]
  rrect40% 0.74x1 smd: 1(-0.68,0) 2(0.68,0)
  body extent -0.8,-0.4 0.8,0.4, height 0.8
"RGY  (S-PVQFN-N14)" [mm] "QFN, 16-Leads, Body 3.50x3.50mm, Pitch 0.50mm, Thermal Pad 2.00x2.00mm, IPC Medium Density"
  oval 0.8x0.2 smd: 1(-1.75,0.5) 7(1.75,0.5) 8(1.75,-0.5) 14(-1.75,-0.5)
  oval 0.2x0.8 smd: 2(-1,1.75) 3(-0.5,1.75) 4(0,1.75) 5(0.5,1.75) 6(1,1.75) 9(1,-1.75) 10(0.5,-1.75) 11(0,-1.75) 12(-0.5,-1.75) 13(-1,-1.75)
  rect 2x2 smd: 15(0,0)
  silkscreen extent -2.75,-1.97 1.97,1.97, body extent -1.83,-1.83 1.83,1.83, height 1
SMA-SM [mil]
  rect 79x79 smd: A(79,0) C(-78.74,0)
  silkscreen extent -89,-49 89,50, body extent -105,-54 105,55, height 116
SOD323-R [mil]
  rect 24x24 smd: A(44,0) C(-43.31,0)
  body extent -50,-31 50,31, height 28
SOD523 [mil]
  rect 28x20 smd: A(27.56,0) C(-27.56,0)
  body extent -30,-16 30,16, height 28
SOT95P230X110-3N [mm] "SOT23, 3-Leads, Body 2.90x2.30mm, Pitch 0.95mm, IPC Medium Density"
  rect 1.4x0.6 smd: 1(-0.95,0.95) 2(-0.95,-0.95) 3(0.95,0)
  silkscreen extent -1.07,-1.5 0.7,1.92, body extent -0.7,-1.5 0.7,1.5, height 1.1
SOT230P700X190-4N [mm] "SOT223, 4-Leads, Body 6.50x7.00mm (avg), Pitch 2.30mm, IPC Medium Density"
  rect 2.4x1 smd: 1(-2.9,2.3) 2(-2.9,0) 3(-2.9,-2.3)
  rect 2.4x3.25 smd: 4(2.9,0)
  silkscreen extent -3.02,-3.35 1.4,3.48, body extent -1.85,-3.35 1.85,3.35, height 1.9
"Ti DCU (R-PDSO-G8) SOIC - SN74VC1G139" [mm] "TSSOP, 8-Leads, Body 2.00x2.30mm, Pitch 0.50mm, IPC Medium Density"
  oval 0.8x0.3 smd: 1(-1.6,0.75) 2(-1.6,0.25) 3(-1.6,-0.25) 4(-1.6,-0.75) 5(1.6,-0.75) 6(1.6,-0.25) 7(1.6,0.25) 8(1.6,0.75)
  silkscreen extent -1.72,-1.05 0.8,1.57, body extent -1.2,-1.05 1.2,1.05, height 0.9
TP-2 [mil]
  round 50 smd: 1(0,0)
TSQFP50P900X900X120-48N [mm] "TSQFP, 48-Leads, Body 7.00x7.00mm, Pitch 0.50mm, IPC Medium Density"
  oval 1.4x0.3 smd: 1(-4.2,2.75) 2(-4.2,2.25) 3(-4.2,1.75) 4(-4.2,1.25) 5(-4.2,0.75) 6(-4.2,0.25) 7(-4.2,-0.25) 8(-4.2,-0.75) 9(-4.2,-1.25) 10(-4.2,-1.75) 11(-4.2,-2.25) 12(-4.2,-2.75) 25(4.2,-2.75) 26(4.2,-2.25) 27(4.2,-1.75) 28(4.2,-1.25) 29(4.2,-0.75) 30(4.2,-0.25) 31(4.2,0.25) 32(4.2,0.75) 33(4.2,1.25) 34(4.2,1.75) 35(4.2,2.25) 36(4.2,2.75)
  oval 0.3x1.4 smd: 13(-2.75,-4.2) 14(-2.25,-4.2) 15(-1.75,-4.2) 16(-1.25,-4.2) 17(-0.75,-4.2) 18(-0.25,-4.2) 19(0.25,-4.2) 20(0.75,-4.2) 21(1.25,-4.2) 22(1.75,-4.2) 23(2.25,-4.2) 24(2.75,-4.2) 37(2.75,4.2) 38(2.25,4.2) 39(1.75,4.2) 40(1.25,4.2) 41(0.75,4.2) 42(0.25,4.2) 43(-0.25,4.2) 44(-0.75,4.2) 45(-1.25,4.2) 46(-1.75,4.2) 47(-2.25,4.2) 48(-2.75,4.2)
  silkscreen extent -4.32,-3.1 3.1,3.57, body extent -3.5,-3.5 3.5,3.5, height 1.2
VSSOP10 [mm]
  rect 1.02x0.3 smd mask+0.102: 1(-2.4,1) 2(-2.4,0.5) 3(-2.4,0) 4(-2.4,-0.5) 5(-2.4,-1) 6(2.4,-1) 7(2.4,-0.5) 8(2.4,0) 9(2.4,0.5) 10(2.4,1)
  rect 1.73x1.9 smd: 11(0,0)
  silkscreen extent -2.02,-1.7 0.65,1.82, body extent -1.55,-1.7 1.55,1.7, height 1.09
Wave_hole_3x7-singleSided#1 [mil]
  round 0 hole 118.11 unplated paste+0 mask-112: 0(0,0)
  round 0 hole 15 paste-20 mask-20: 1(-100,0) 1(-70,-70) 1(-70,70) 1(0,-100) 1(0,100) 1(70,-70) 1(70,70) 1(100,0)
  round 60 smd paste-5 mask+0: 1(-94.49,-39.37) 1(-94.49,39.37) 1(-39.37,-94.49) 1(-39.37,94.49) 1(39.37,-94.49) 1(39.37,94.49) 1(94.49,-39.37) 1(94.49,39.37)
  Top Layer circle w64.96: c0,0 r105
  Bottom Layer lines w64.96: -74.25,74.25 ccw(c0,0) 74.25,-74.25 ccw(c0,0) 105,0 ccw(c0,0) -74.25,74.25
  body extent -105,-105 105,105
Wave_hole_3x7-singleSided#2 [mil]
  round 0 hole 118.11 unplated paste+0 mask-112: 0(0,0)
  round 0 hole 15 paste-20 mask-20: 1(-100,0) 1(-70,-70) 1(-70,70) 1(0,-100) 1(0,100) 1(70,-70) 1(70,70) 1(100,0)
  round 60 smd paste-5 mask+0: 1(-94.49,-39.37) 1(-94.49,39.37) 1(-39.37,-94.49) 1(-39.37,94.49) 1(39.37,-94.49) 1(39.37,94.49) 1(94.49,-39.37) 1(94.49,39.37)
  Top Layer circle w64.96: c0,0 r105
  Bottom Layer lines w64.96: -74.25,-74.25 ccw(c0,0) 0,-105 ccw(c0,0) 105,0 ccw(c0,0) 74.25,74.25 ccw(c0,0) -74.25,-74.25
  body extent -105,-105 105,105
XAL50xx-153 [mm] "Precision Wire Wound Inductor, 2-Leads, Body 5.28x5.48mm, IPC High Density"
  rect 1.18x4.25 smd: 1(-1.655,0) 2(1.655,0)
  silkscreen extent -2.75,-2.85 2.75,2.85, body extent -2.74,-2.84 2.74,2.84, height 4.25

## Part data
C1A C1B C1C C2A C2B C2C C5A C5B C5C C5D C19: library part GRM155R60J474KE19D, "0.47uF 6.3v C0402 - GRM155R60J474KE19D"
C3A C3B C3C C3D C28 C30 C67 C68 C69 C70: library part C0603C104K5RACTU, "CAP CER 0603 100nF 50V 10% X7R"
C4A C4B C4C C4D C18: library part GRM155R71H103JA88D, "CAP CER 10000PF 50V X7R 0402"
C6A C6B C6C C6D C7 C8 C9 C10 C12 C20 C24 C25 C35 C36 C37 C38 C39 C40 C44A C44B C44C C44D C45A C45B C45C C45D C57 C58 C59 C60 C62 C63A C63B: library part GRM155R71C104KA88D, "CAP CER 0402 100nF 16V 10% X7R"
C11 C17: library part "Cap Semi", "Capacitor (Semiconductor SIM Model)"
C13 C14: library part GRM155R71C104KA88D, "CAP CER 0.1UF (100nF) 16V 10% X7R 0402"
C15 C16 C34: library part C1608JB0J106K080AB, "CAP CER 10UF 6.3V 10% JB 0603"
C21 C22 C23 C26 C41A C41B C41C C41D C42A C42B C42C C42D C43A C43B C43C C43D C46A C46B C46C C46D: library part CC0603ZRY5V6BB105, "CAP CER 0603 1uF 10V Y5V"
C27: library part C1206C475K5PACTU, "CAP CER 1206 4.7uF 50V 10% X5R"
C29: library part GRM21BR71H105KA12L, "CAP CER 0805 1uF 50V 10% X7R"
C31: library part C0805C106K8PACTU, "CAP CER 0805 10uF 10V 10% X5R"
C32: library part GRM155R60J105KE19D, "CAP CER 0402 1uF 6.3V 10% X5R"
C33 C64 C65: "CAP ALUM 100UF 35V 20% SMD"
C66: library part UPW1H471MHD1TO, "CAP ALU 470uF 50V 20%"
D5 D6 D8 D9: "LED 0805 Yellow"
D7 D10 D15: library part SK310A, "DIODE Schottky 3A SMA"
D17: "DIODE DO-214AB"
D18: "Z-Diode"
D19 D25: "DIODE Schottky 3A SMA"
D23A D23B D24A D24B: "DIODE SOD523"
DA1A DA1B DA1C DA2: "PESDxL2BT TVS Diode Array 2x"
EXP1 EXP2: "Header, 5-Pin, Dual row"
F1 F2 F3: "FUSE PTH ATO"
FB5 FB6: "FERRITE BEAD 1806 60ohm"
JTAG/DEBUG1: library part "ARM Cortex JTAG-DEBUG Header"
L1: "IND 15uH 3.9A 20%"
LED1: "LED 0805 Green"
M1A M1B M1C M1D M2 M3: library part "Molex 0705430003 Alt", "Molex 4 Pin Clip Connector"
MAX1A MAX1B MAX1C MIN1A MIN1B MIN1C: library part "Molex Endstop"
Q3 Q4: "N-Channel MOSFET"
R1A R1B R1C R2A R2B R2C: library part ERJ-2GEJ272X, "RES SMD 2.7K OHM 5% 1/10W 0402"
R3A R3B R3C R3D R19: library part ERJ2GEJ105X, "RES 0402 1M 100mW 5%"
R4A R4B R4C R4D R20: library part ERJ-2RKF2701X, "RES SMD 2.7K OHM 1% 1/10W 0402"
R5A R5B R5C R5D R21 R22 R31A R31B R31C R31D: library part CSRN2512FTR100, "RES SMD 0.1 OHM 1% 2W 2512"
R6 R24 R41: "Resistor"
R7 R10 R13 R16: library part RC0603JR-071K8L, "RES 0603 1.8K 100mW 5%"
R8 R11 R14 R17: library part CRCW060310R0FKEA, "RES 0603 10r 100mW 1%"
R9 R12 R15 R18: library part RC1005F104CS, "RES SMD 100K OHM 1% 1/16W 0402"
R23: library part CRCW0402200KFKED, "RES 0402 22r 63mW 1%"
R25 R27 R28 R29: library part ERJ-3EKF1002V, "RES 0603 10K 100mW 1%"
R26: library part RL2512FK-070R06L, "RES 0.06 OHM 1W 1% 2512 SMD"
R30: library part ERJ-3EKF1001V, "RES 0603 1K 100mW 1%"
R37 R39: library part Res3, "Resistor"
R38 R40: library part RC1608F240CS, "RES SMD 24 OHM 1% 1/10W 0603"
R43A R43B R44A R44B: library part ERJ3EKF4701V, "RES 0603 4.7K 100mW 1%"
S1: library part 1571610-2_1, "SWTCH Momentary Washable"
T1 T2: library part con-phoenix-508_4
TP1A TP1B TP1C TP2A TP2B TP2C TP3A TP3B TP3C TP3D TP10 TP11 TP12 TP13 TP14 TP15 TP16 TP23 TP26A TP26B: library part Socket, "Socket"
U1A U1B U1C U1D U3: "DRV8825 Ti Stepper Driver"
U2: "TXS0104E - Bidriectional Opendrain/pushpull level shift"
U4: library part LM25011, "REG BUCK"
U12: "USB Opto Isolator"

## Via types
v1: diameter 25, hole 15, Top Layer to Bottom Layer, 207 vias
v2: diameter 30, hole 15, Top Layer to Bottom Layer, tented both sides, 81 vias
v3: diameter 19.68, hole 7.87, Top Layer to Bottom Layer, 79 vias
v4: diameter 25, hole 15, Top Layer to Bottom Layer, tented both sides, 44 vias
v5: diameter 30, hole 15, Top Layer to Bottom Layer, tented bottom, 32 vias
v6: diameter 30, hole 15, Top Layer to Bottom Layer, 10 vias
v7: diameter 50, hole 30, Top Layer to Bottom Layer, 2 vias

## Nets (pads, with @x,y where several pads share a name; then routed paths per layer and width w, separated by ;. In a path a pad name is that pad's centre, name@x,y a point inside that pad or via, vN(x,y) a via of type N, cw(c..) or ccw(c..) an arc to the next point about the centre after c; other vN are vias at no path point)
3.3VCC: C7.1 C8.1 C9.1 C10.1 C13.2 C16.2 C24.1 C25.1 C33.1 C35.1 C38.1 C39.1 C40.1 C44A.1 C44B.1 C44C.1 C44D.1 C45A.1 C45B.1 C45C.1 C45D.1 C57.1 EXP2.10 FB1.2 JTAG/DEBUG1.1 MAX1A.3 MAX1B.3 MAX1C.3 MIN1A.3 MIN1B.3 MIN1C.3 R1A.2 R1B.2 R1C.2 R2A.2 R2B.2 R2C.2 R30.2 R41.2 R43A.2 R43B.2 U1A.16 U1A.17 U1B.16 U1B.17 U1C.16 U1C.17 U1D.16 U1D.17 U2.1 U3.16 U3.17 U5.3 U6.8 U7.8 U8.8 U9.8 U10.17 U10.36 U10.44 U12.12 U12.13 U12.14 | length 1499.4
  Top Layer w8: v1(555.75,825) 570.49,839.74 C44A.1@593.74,839.74 ; U1A.17@595.16,762.2 C44A.1@595.16,833.78 ; C44A.1@595.16,838.32 C44A.1@593.74,839.74 ; U1A.16@620.75,762.2 C45A.1@620.75,828.82 ; C45A.1@630.43,838.5 629.2,839.74 C44A.1@593.74,839.74 ; v1(690.75,5785) 705.49,5799.74 C44D.1@728.74,5799.74 ; v1(710.75,4605) 725.49,4619.74 C44C.1@748.74,4619.74 ; U1D.17@730.16,5722.2 C44D.1@730.16,5793.78 ; C44D.1@730.16,5798.32 C44D.1@728.74,5799.74 ; U1C.17@750.16,4542.2 C44C.1@750.16,4613.78 ; C44C.1@750.16,4618.32 C44C.1@748.74,4619.74 ; U1D.16@755.75,5722.2 C45D.1@755.75,5788.82 ; C45D.1@765.43,5798.5 764.2,5799.74 C44D.1@728.74,5799.74 ; U1C.16@775.75,4542.2 C45C.1@775.75,4608.82 ; C45C.1@785.43,4618.5 784.2,4619.74 C44C.1@748.74,4619.74 ; C57.1@1111.3,1880 C57.1@1115,1876.3 ; 1669.92,2195 1670,2195.08 ; v1(1948.74,821.38) 1964.74,837.38 C24.1@1983.74,837.38 ; U3.17@1985.16,759.84 1985.16,835.96 C24.1@1983.74,837.38 ; U3.16@2008.74,761.85 U3.16@2010.75,759.84 2010.75,808.39 2023.74,821.38 C25.1@2023.74,836.38 ; C25.1@2023.74,837.38 C24.1@1983.74,837.38 ; v4(2755,2565) 2756,2566 C13.2@2790,2566 2796.32,2559.68 2860.32,2559.68 2880.32,2539.68 U2.1@2901.1,2539.68 ; v1(7547.05,3710) 7561.79,3724.74 C44B.1@7585.04,3724.74 ; U1B.17@7586.46,3647.2 C44B.1@7586.46,3718.78 ; C44B.1@7586.46,3723.32 C44B.1@7585.04,3724.74 ; U1B.16@7612.05,3647.2 C45B.1@7612.05,3713.82 ; C45B.1@7621.73,3723.5 7620.5,3724.74 C44B.1@7585.04,3724.74
  Top Layer w15: 1040.12,1780 1040.12,1830 1040.12,1880 C57.1@1111.3,1880 ; v1(1635,2195) 1669.92,2195
  other v1: 1880,2515 1945,2515 2010,2515 2075,2515 1880,2580 1945,2580 2010,2580 2075,2580
+5VCC: C14.2 C15.2 C30.1 C31.1 C34.2 EXP1.10 L1.2 R25.2 R27.1 R29.2 TP23.1 U2.14 U5.1 | length 2307.6
  Top Layer w8: C14.2@2790,2514 2876,2514 2889.69,2500.31 U2.14@2901.1,2500.31
  Top Layer w10: v1(2675,2735) 2675,2595 2750,2520 C14.2@2789,2520 ; v1(3125,2470) R25.2@3125,2505.33 ; R27.1@3208.31,2378.66 3210,2376.97 v2@3210,2345
  Top Layer w20: U5.1@2250.55,2724.17 2259.17,2724.17 2300,2765 v1(2360,2765)
  Top Layer w25: C34.2@2323.23,2725 2323.23,2760.23
  Top Layer w32: C31.1@3448.31,2711.69 3637.05,2711.69 3653.31,2695.43 L1.2@3653.31,2685.58 ; v1(3640,2760) 3673.23,2760 C30.1@3678.23,2755 3678.23,2745.18 3700,2723.41 3700,2690 L1.2@3710,2680
  Bottom Layer w20: v1(2360,2765) 2705,2765 ; v1(2675,2735) 2705,2765 ; v1@3635,2765 2705,2765
  Bottom Layer w25: v1@3635,2765 v1(3640,2760)
  other v2: 3210,2335
+12VCC1: C3A.2 C3B.2 C3C.2 C3D.2 C17.1 C66.1 D25.C F3.2 R3A.2 R3B.2 R3C.2 R3D.2 R6.1 R19.2 U1A.4 U1A.11 U1B.4 U1B.11 U1C.4 U1C.11 U1D.4 U1D.11 U3.4 U3.11 | length 2332.6
  Top Layer w12: 371.26,473.74 380.26,482.74 380.26,494.25 390.43,504.42 U1A.4@390.43,537.8 ; 506.26,5433.74 515.26,5442.74 515.26,5454.25 525.43,5464.42 U1D.4@525.43,5497.8 ; 526.26,4253.74 535.26,4262.74 535.26,4274.25 545.43,4284.42 U1C.4@545.43,4317.8 ; U1A.11@569.57,537.8 569.57,505.43 595,480 ; U1D.11@704.57,5497.8 704.57,5465.43 730,5440 ; U1C.11@724.57,4317.8 724.57,4285.43 750,4260 ; 1761.26,471.38 1770.26,480.38 1770.26,491.89 1780.43,502.06 U3.4@1780.43,535.43 ; U3.11@1959.57,535.43 1959.57,503.07 1985,477.64 ; 7362.56,3358.74 7371.56,3367.74 7371.56,3379.25 7381.73,3389.42 U1B.4@7381.73,3422.8 ; U1B.11@7560.87,3422.8 7560.87,3390.43 7586.3,3365
  Top Layer w30: C3A.2@223.74,376.18 248.7,376.18 271.26,398.74 293.74,398.74 v2(303.74,388.74) 303.74,406.22 371.26,473.74 ; C3D.2@358.74,5336.18 383.7,5336.18 406.26,5358.74 428.74,5358.74 v2(438.74,5348.74) 438.74,5366.22 506.26,5433.74 ; C3C.2@378.74,4156.18 403.7,4156.18 426.26,4178.74 448.74,4178.74 v2(458.74,4168.74) 458.74,4186.22 526.26,4253.74 ; 595,480 595,458.69 652.5,401.19 652.5,399.98 v2(663.74,388.74) ; 730,5440 730,5418.69 787.5,5361.19 787.5,5359.98 v2(798.74,5348.74) ; 750,4260 750,4238.69 807.5,4181.19 807.5,4179.98 v2(818.74,4168.74) ; C17.1@1613.74,373.82 1638.7,373.82 1661.26,396.38 1683.74,396.38 v2(1693.74,386.38) 1693.74,403.86 1761.26,471.38 ; 1985,477.64 1985,456.33 2042.5,398.83 2042.5,397.62 v2(2053.74,386.38) ; C3B.2@7215.04,3261.18 7240,3261.18 7262.56,3283.74 7285.04,3283.74 v2(7295.04,3273.74) 7295.04,3291.22 7362.56,3358.74 ; 7586.3,3365 7586.3,3343.69 7643.8,3286.19 7643.8,3284.98 v2(7655.04,3273.74)
+12VCC2: C27.1 C29.1 C65.1 D7.C D19.C F2.2 FAN-1.1 FAN-2.1 R7.2 R10.2 R13.2 R23.2 T2.4 U4.1 | length 675.5
  Top Layer w8: v1(2765.01,1908.99) R10.2@2765.01,1944.99
  Top Layer w12: C29.1@3140.68,2648.95 3149.83,2639.8 U4.1@3193.83,2639.8
  Top Layer w15: v1(3035,2320) 3035,2296.78 R7.2@3050,2281.77
  Top Layer w24: C29.1@3113.31,2658.02 3099.31,2644.02 R23.2@3099.31,2605.43 3099.31,2594.31 3075,2570 3075,2367.53 v4(3165,2277.53) ; C29.1@3113.31,2668.02 3128.17,2668.02 3160.57,2700.43 3171.15,2700.43 ; v4(3205,2280) R13.2@3238.23,2280
+12VCC3: C64.1 D10.C D17.C F1.2 R16.2 T2.2
AN1: C63A.1 D23A.A D24A.C R44A.1 TP26A.1
AN2: C63B.1 D23B.A D24B.C R44B.1 TP26B.1
BZR_PWM: EXP1.1
DIR1: U1A.20
DIR2: U1B.20
DIR3: U1C.20
DIR4: U1D.20
DIR_Z: U3.20 | length 280
  Top Layer w8: U3.20@1908.39,759.84 1908.39,810.28 1915.75,817.64 ; 2120,1580 2275,1425
DRV_REF_CS: U11.5
DRV_REF_MOSI: U11.7
DRV_REF_SCLK: U11.8
E0_DRV_REF: R4C.1 U11.17
EN1: U1A.21 U6.7
EN2: U1B.21 U7.7
EN3: U1C.21 U9.7
EN4: U1D.21
EN_Z: U3.21 U8.7 | length 360.9
  Top Layer w8: 1875.75,917.64 1875.75,812.64 1882.8,805.59 U3.21@1882.8,759.84 ; 2118.47,1560.32 2260,1418.79
EXP0_DRV_REF: U11.14
EXP1_DRV_REF: U11.11
FGND: H1.1 H2.1 H3.1 H4.1 | length 12
  Bottom Layer w40: 3862.76,122.6 H2.1@3867.01,126.85
  Bottom Layer w64.96: H2.1@4007.01,266.85 4011.25,271.1